# EAGLE board board design (EAGLE 9.6.2)
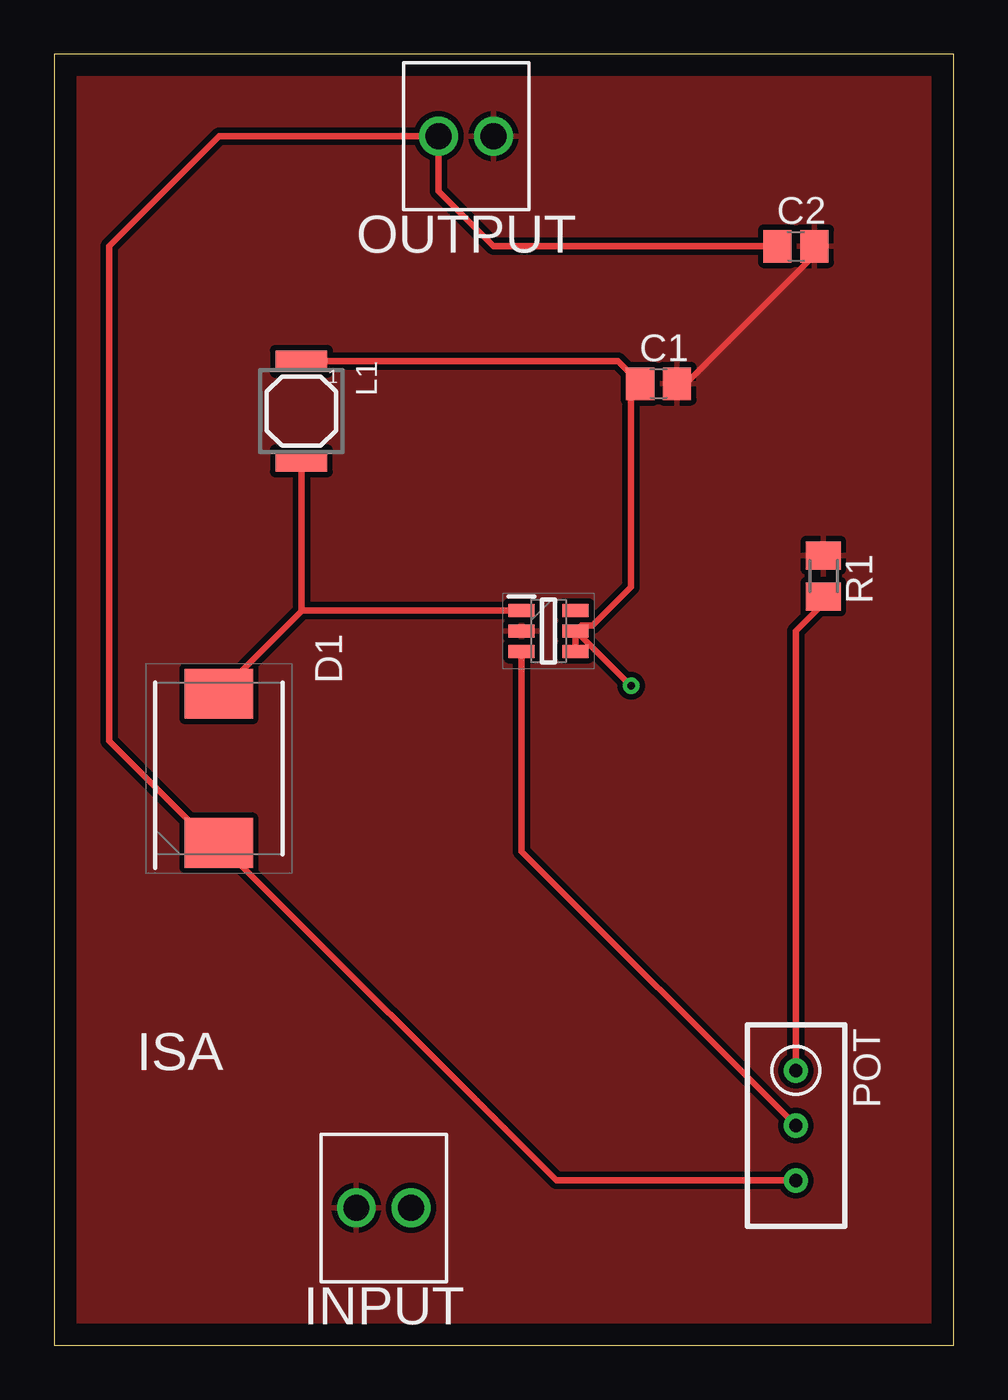
[diagram p0: board, top side]
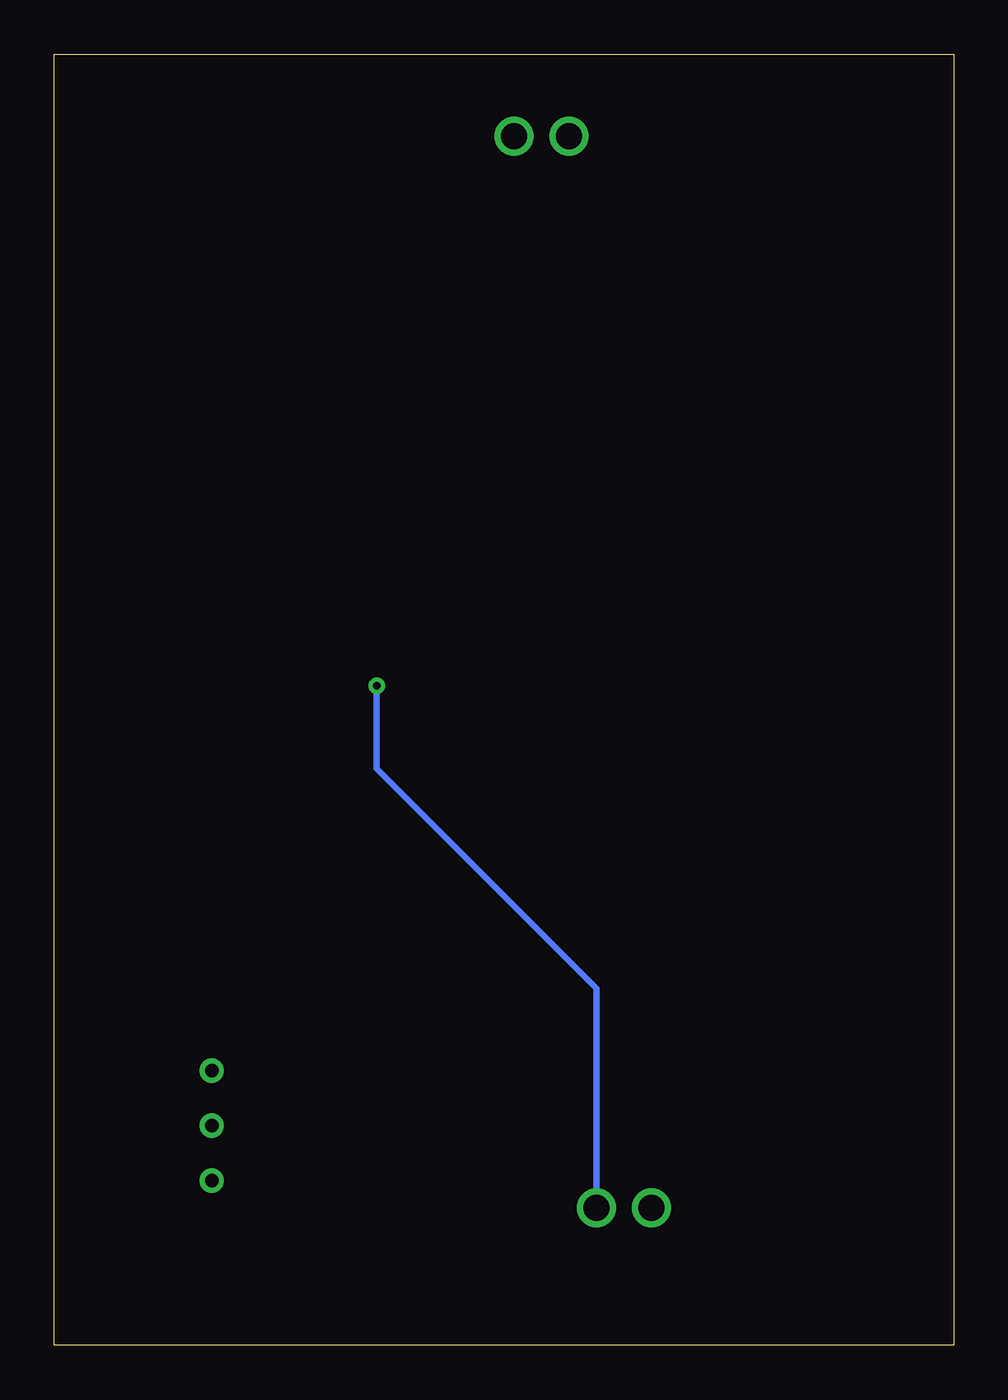
[diagram p1: board, bottom side, seen from below]

Size 41.58 x 59.68 mm. Coordinates in mm from the lower left corner, seen from the top.
Outline: 0,0 41.58,0 41.58,59.68 0,59.68 0,0
Copper layers (1*16): Top 0.035mm / dielectric 1.5mm / Bottom 0.035mm
Design rules "default": minimum track width 6mil, minimum drill 0.35mm, track to track 6mil, track to pad 6mil, pad to pad 6mil, via to via 6mil, smd to smd 6mil, copper to edge 40mil, drill to drill 6mil, minimum pad ring 10mil, minimum via ring 8mil, stop-mask expansion 4mil, vias tented up to drill 0mil, thermal gap 10mil
Net classes: 0 default: width 0.305 mm, drill 0.254 mm, clearance 0.254 mm

## Footprints (pad centres in the part's own frame; a part is rotated, then mirrored left to right if it is on the bottom)
C0805 = smd 1.3 x 1.5: 1 -0.85,0; 2 0.85,0
DIOM7959X262N = smd 2.3 x 3.15: 1 -3.45,0; 2 3.45,0
TERMBLK_254-2N = drill 1.2: 1 0,0; 2 2.54,0
MS42 = smd 2.4 x 1: 1 0,2.3; 2 0,-2.3
RTRIM3296W = drill 0.61: 1 0,-2.54; 2 0,0; 3 0,2.54
M0805 = smd 1.3 x 1.6: 1 -0.95,0; 2 0.95,0
SOT95P280X145-6N = smd 1.2 x 0.6: 1 -1.25,0.95; 2 -1.25,0; 3 -1.25,-0.95; 4 1.25,-0.95; 5 1.25,0; 6 1.25,0.95

## Placement (x,y rotation side)
C1  [C0805]  27.94,44.45 0 top
C2  [C0805]  34.29,50.8 0 top
D1  SS34  [DIOM7959X262N]  7.62,26.67 90 top
INPUT  2828XX-2282834-2  [TERMBLK_254-2N]  13.97,6.35 0 top
L1  MS42  [MS42]  11.43,43.18 180 top
OUTPUT  2828XX-2282834-2  [TERMBLK_254-2N]  17.78,55.88 0 top
POT  [RTRIM3296W]  34.29,10.16 180 top
R1  [M0805]  35.56,35.56 270 top
U1  MT3608  [SOT95P280X145-6N]  22.86,33.02 0 top

## Library data of the parts
C1 C2 R1 = adafruit
D1 = SS34; DESCRIPTION: TAIWAN SEMICONDUCTOR - SS34 - DIODE, SCHOTTKY, 3A, 40V; HEIGHT: 2.62mm; MANUFACTURER_NAME: Taiwan Semiconductor; MANUFACTURER_PART_NUMBER: SS34; MOUSER_PART_NUMBER: 821-SS34; MOUSER_PRICE-STOCK: https://www.mouser.co.uk/ProductDetail/Taiwan-Semiconductor/SS34?qs=JV7lzlMm3yIimVqgKV%2F1SA%3D%3D
INPUT OUTPUT = Connector
L1 = inductor-neosid; OC_FARNELL: unknown; OC_NEWARK: unknown
POT = resistor
U1 = MT3608; DESCRIPTION: High Efficiency 1.2MHz 2A Step Up Converter; HEIGHT: 1.45mm; MANUFACTURER_NAME: Aerosemi; MANUFACTURER_PART_NUMBER: MT3608

## Nets
GND: C1.2 C2.2 INPUT.1 OUTPUT.2 R1.1 U1.2
IND: D1.2 L1.1 U1.1
N$1: C1.1 INPUT.2 L1.2 U1.4 U1.5
N$2: POT.1 R1.2
N$4: POT.2 U1.3
N$5: C2.1 D1.1 OUTPUT.1 POT.3

## Tracks (layer width: path | path; a pad name or v marks a point on that pad's centre or on a via)
GND
  Top 0.305: C1.2 29,44.24 35.14,50.38 C2.2
  pour Top: -3.81,62.23 44.45,62.23 45.72,60.96 45.72,-1.27 44.45,-2.54 -3.81,-2.54
IND
  Top 0.305: D1.2 11.47,33.97 | 11.47,33.97 U1.1 | L1.1 11.43,34.01 11.47,33.97
N$1  (via drill 0.35)
  Top 0.305: L1.2 26.06,45.48 C1.1 26.67,44.03 26.67,35.05 24.88,33.26 24.37,33.26 24.13,33.02 | v26.67,30.48 24.13,33.02 | 24.13,33.02 U1.5 | U1.4 24.11,33 24.13,33.02
  Bottom 0.305: INPUT.2 16.51,16.51 26.67,26.67 v26.67,30.48
N$2
  Top 0.305: POT.1 34.29,33.02 35.56,34.29 R1.2
N$4
  Top 0.305: POT.2 21.61,22.84 U1.3
N$5
  Top 0.305: C2.1 20.32,50.8 17.78,53.34 OUTPUT.1 7.62,55.88 2.54,50.8 2.54,27.94 7.44,23.04 7.8,23.04 | D1.1 7.8,23.04 | 7.8,23.04 23.22,7.62 POT.3

## Text on the board
tPlace: ISA